# Altium PCB PCB1.PcbDoc (part 1 of 2)
Units mm, origin at the board's own origin, x right, y up, seen from the top; angles counter-clockwise.
Board outline 48 x 73.5 mm, 4 copper layers (Top Copper, Signal Layer 1, Signal Layer 2, Bottom Copper), stack 1.582 mm thick; 72 components, 51 nets, 278 pads, 725 vias.
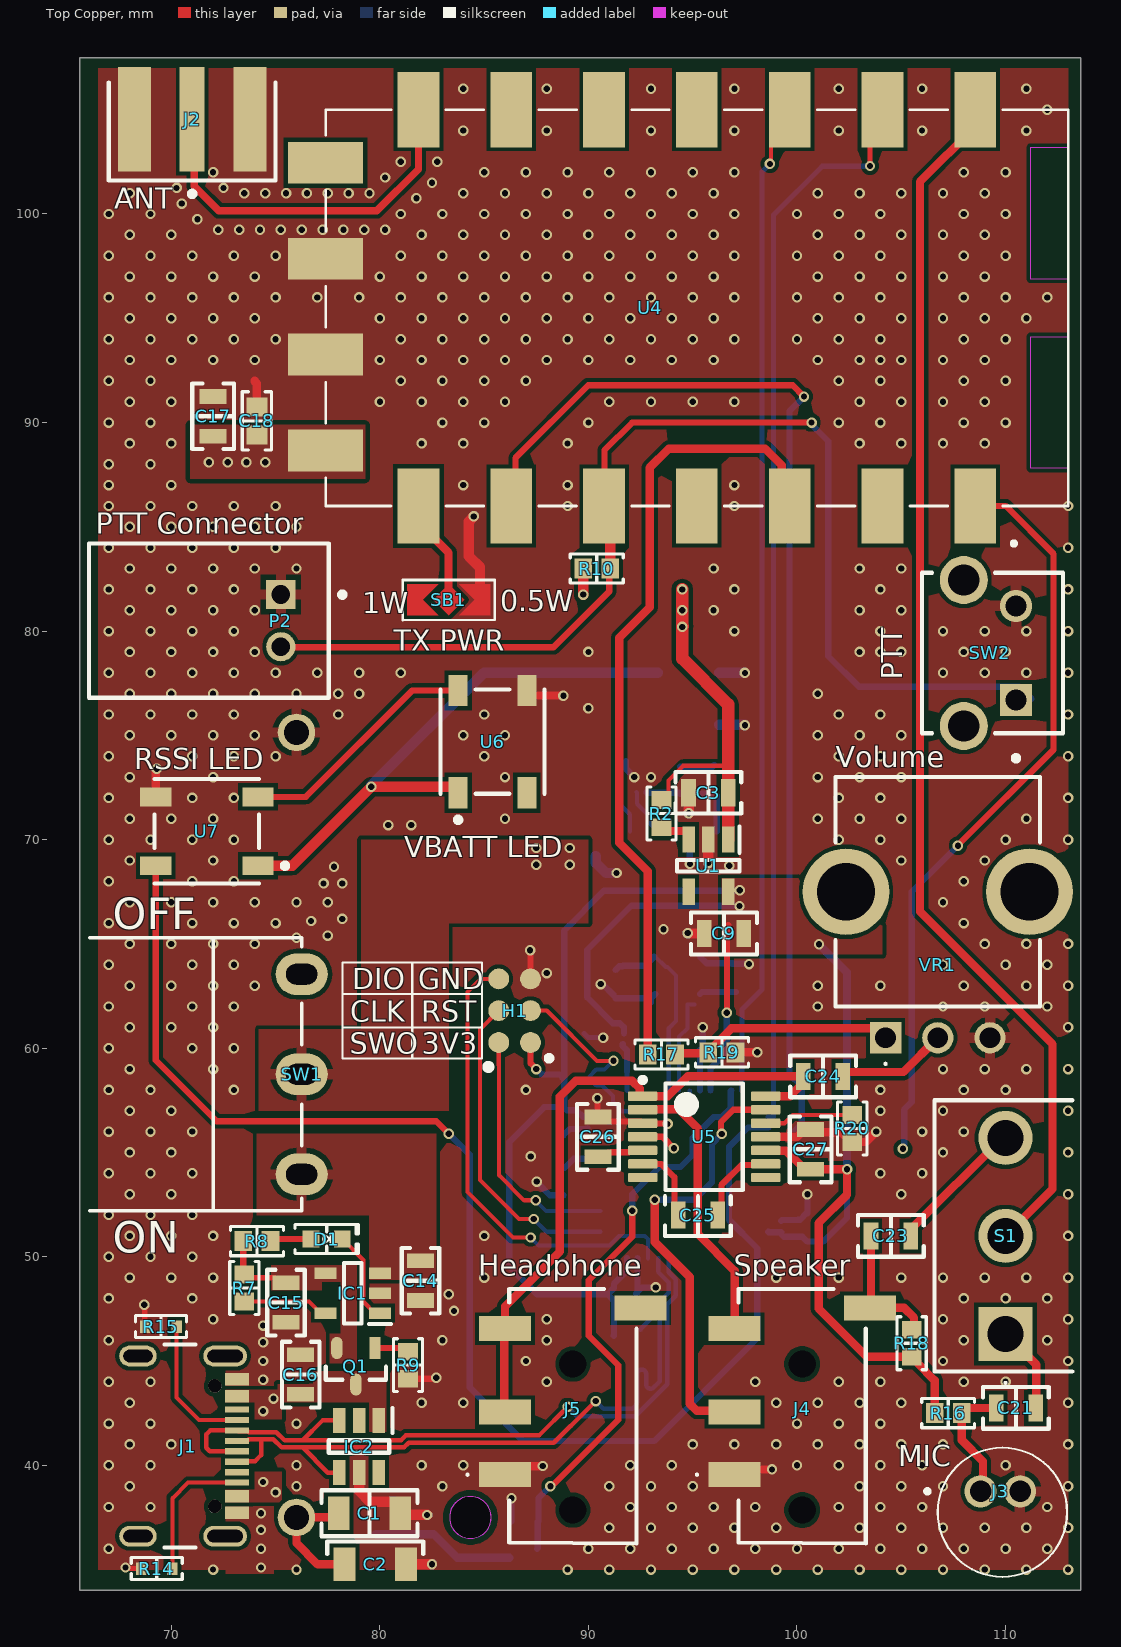
[diagram p0: Top Copper view]
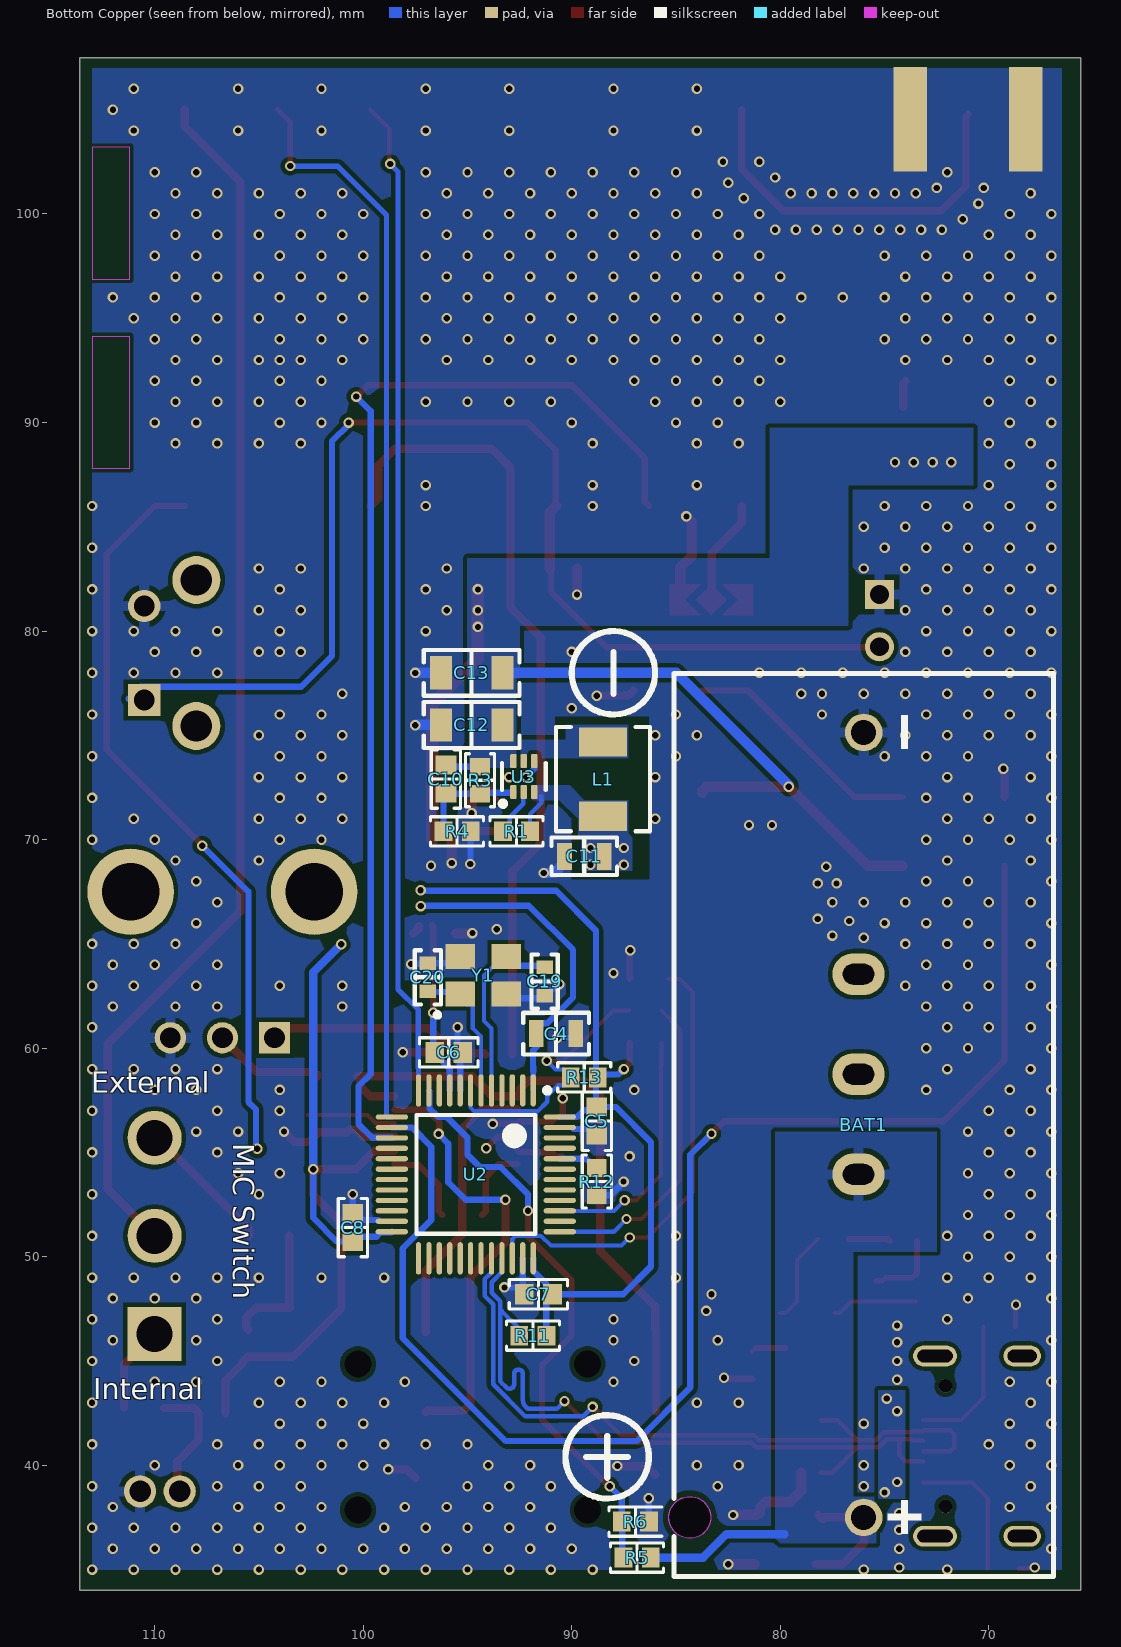
[diagram p1: Bottom Copper view, seen from below]
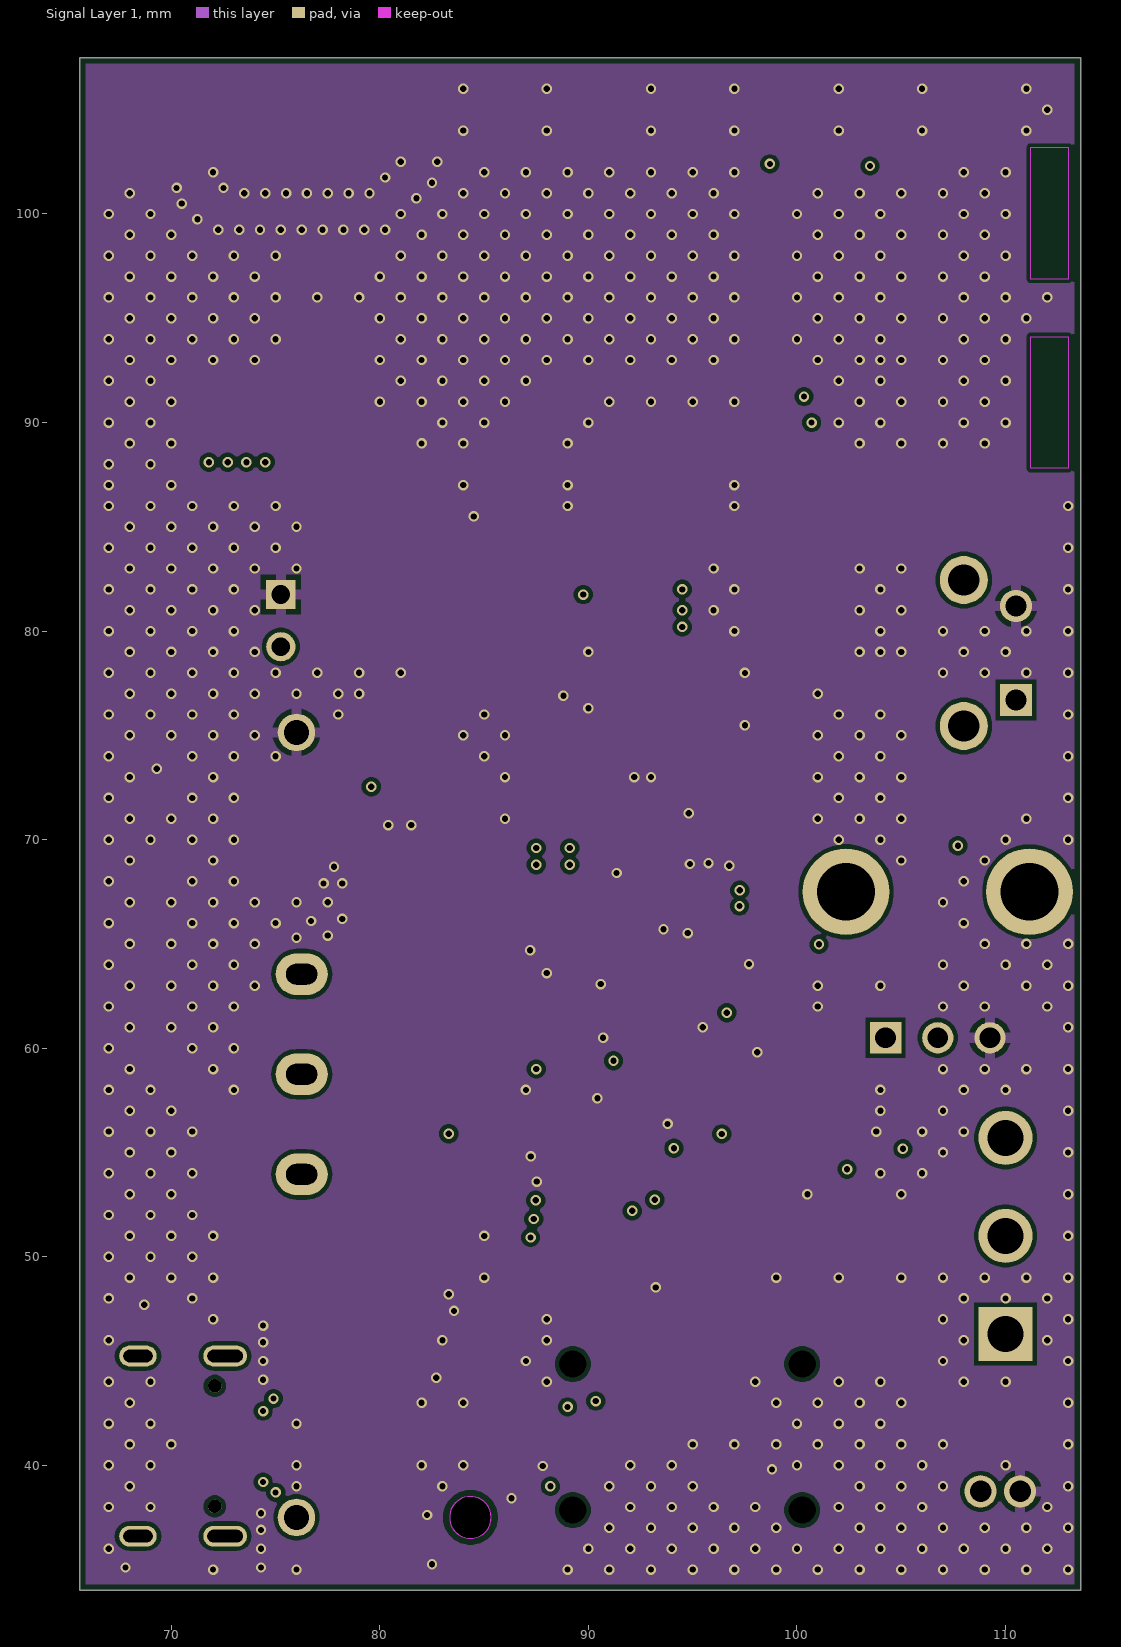
[diagram p2: Signal Layer 1]
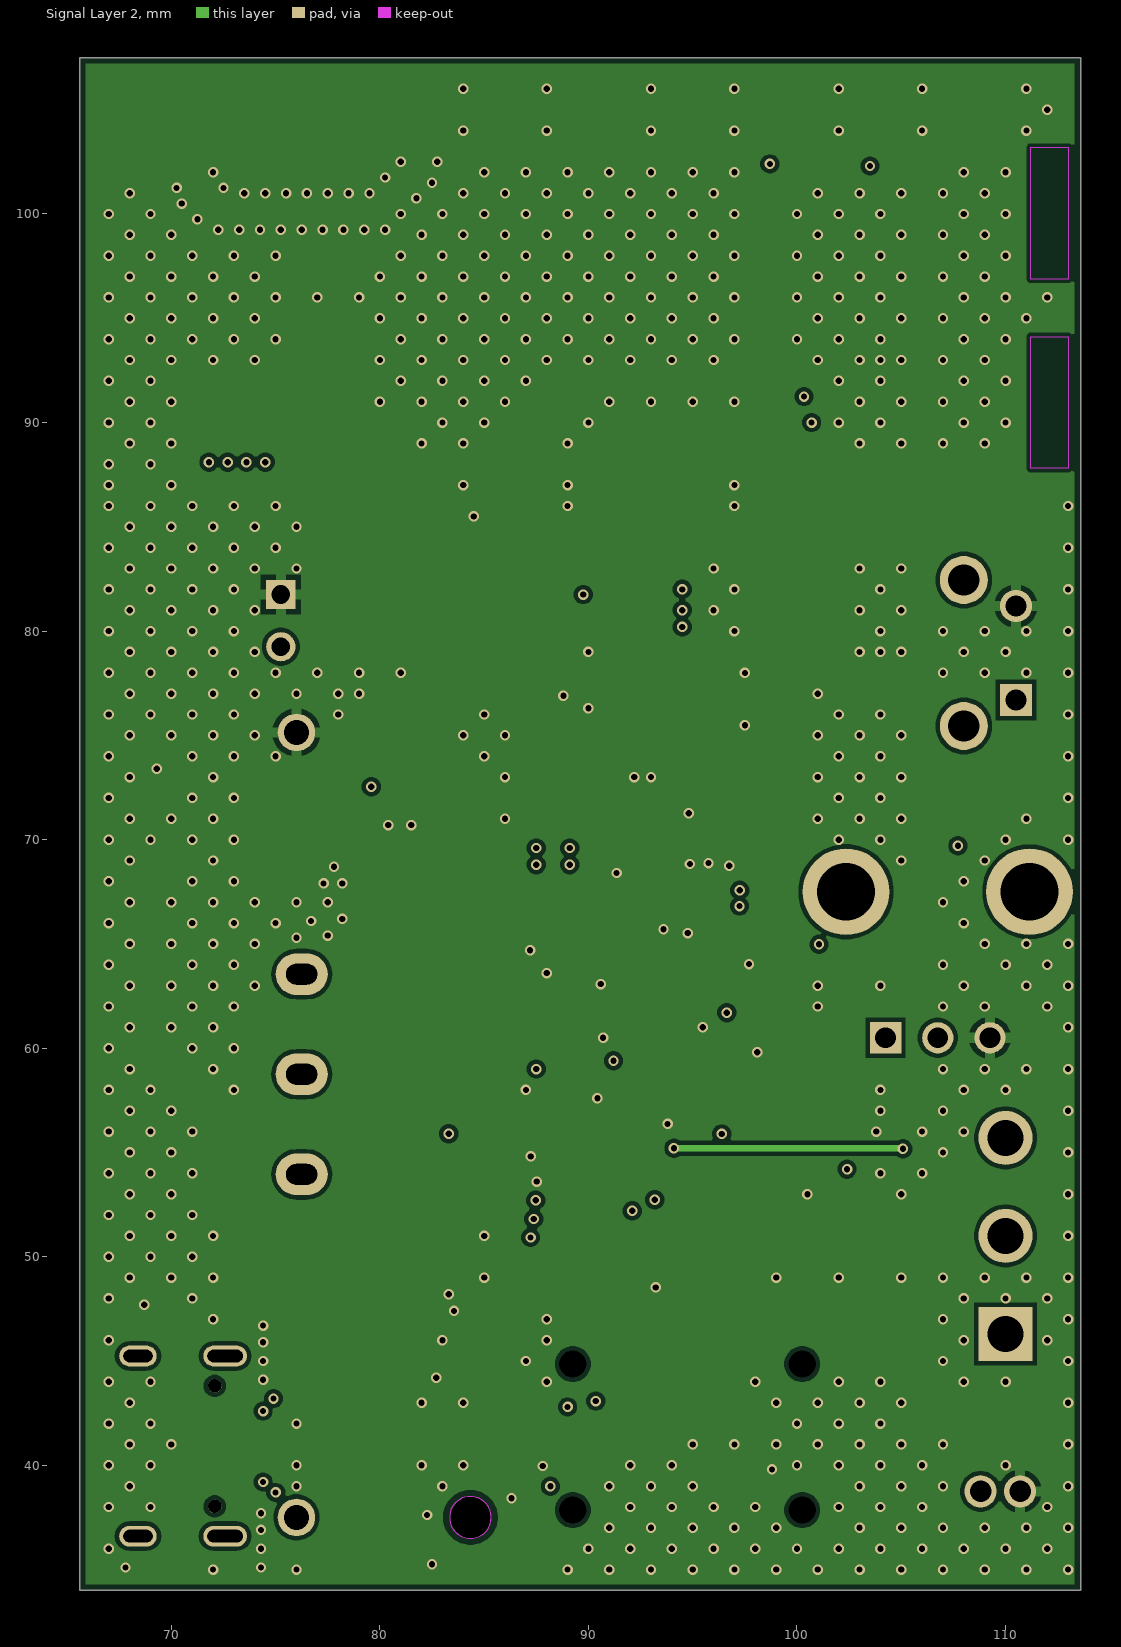
[diagram p3: Signal Layer 2]
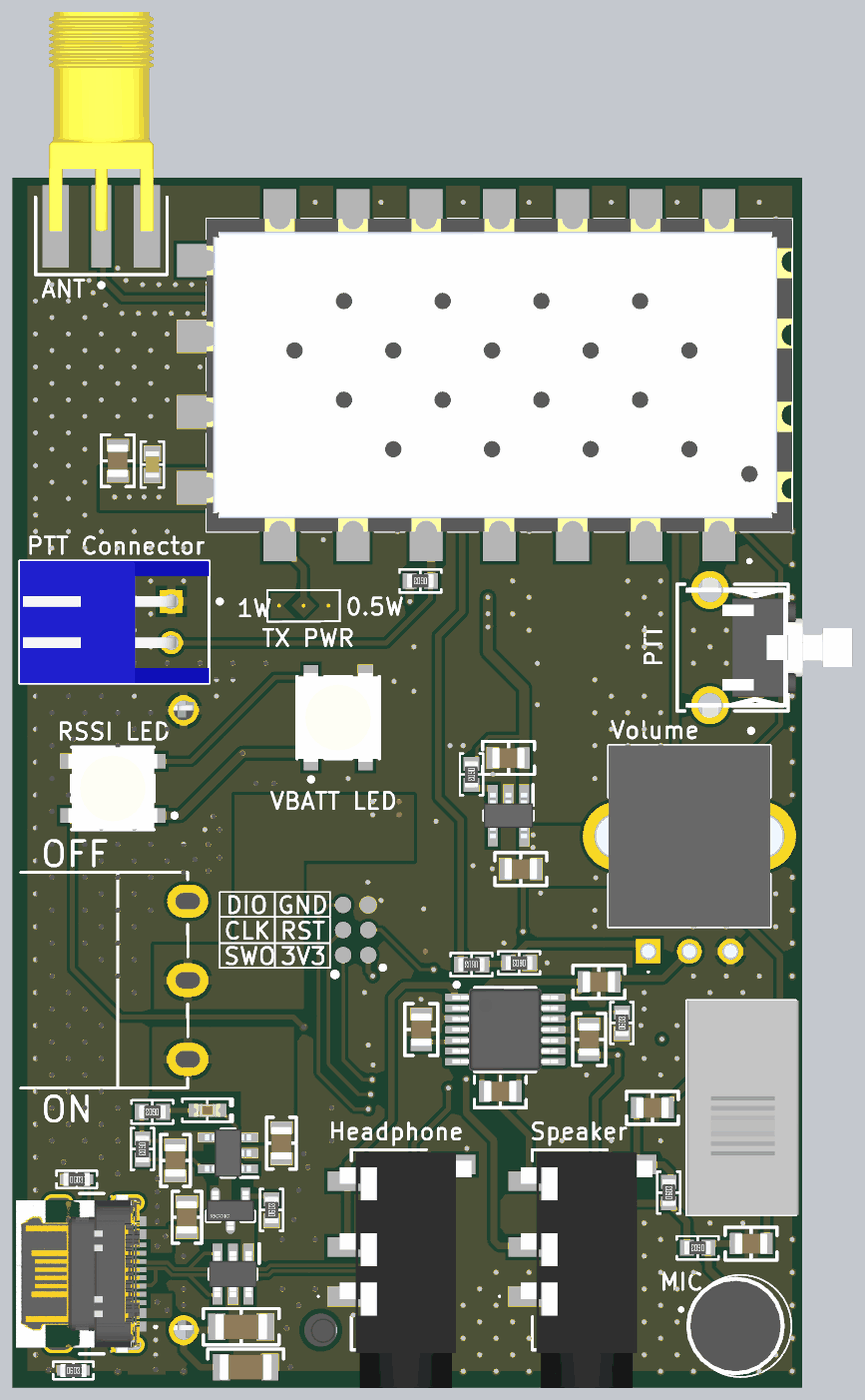
[diagram p5: 3D render of the assembled board from above, using the file's embedded part models]
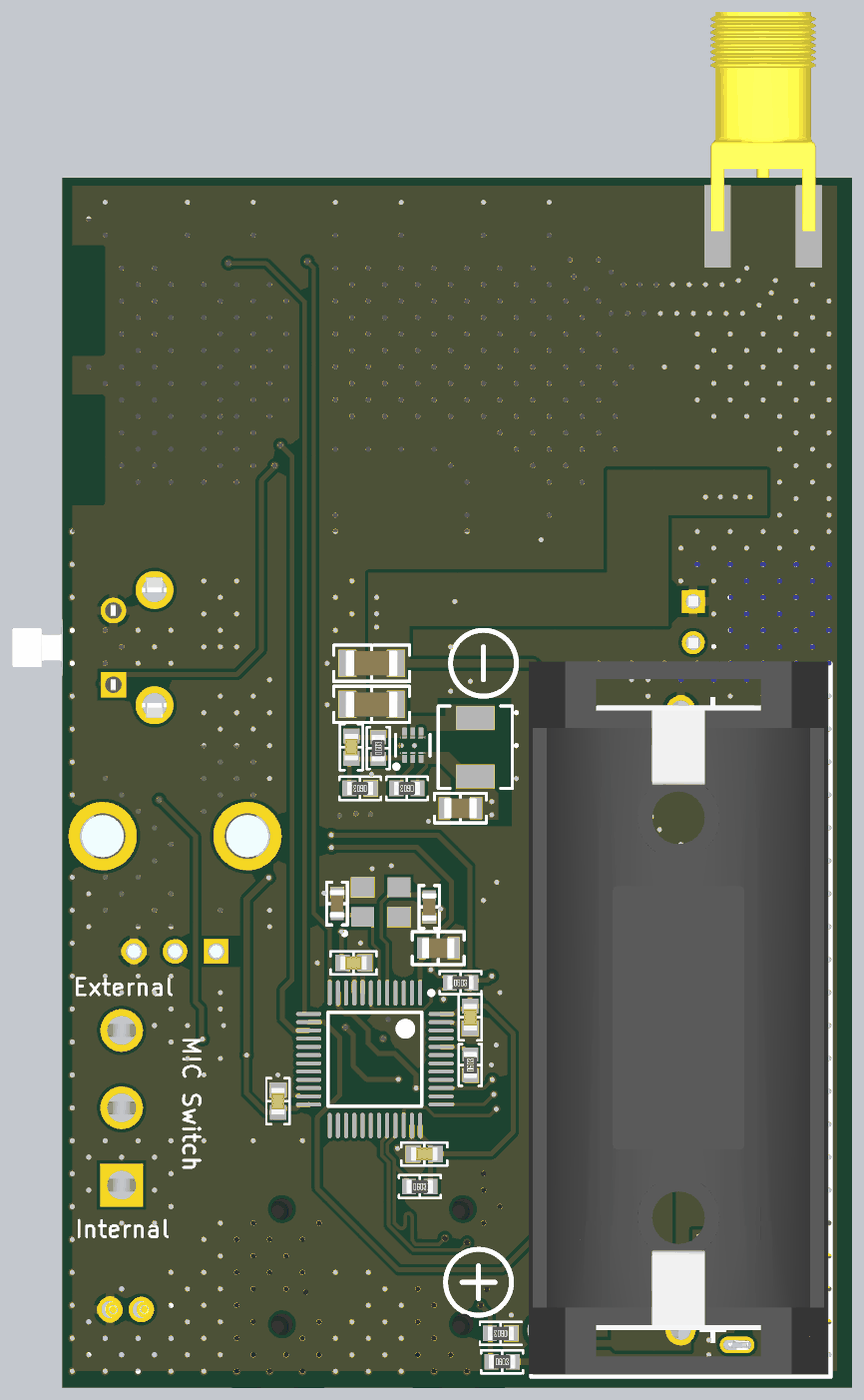
[diagram p6: 3D render of the assembled board from below, using the file's embedded part models]

## Layer stack, top to bottom
Top Mask: solder mask 0.015, Solder Resist, Dk 3.8
Top Copper: signal copper 0.035
Dielectric 1: prepreg 0.2083, PP-022, Dk 4.5
Signal Layer 1: signal copper 0.0152
Core: core 1.065, FR-4, Dk 4.5
Signal Layer 2: signal copper 0.0152
Dielectric 2: prepreg 0.2083, PP-022, Dk 4.5
Bottom Copper: signal copper 0.035
Bottom Mask: solder mask 0.015, Solder Resist, Dk 3.8

## Board outline
65.6,34 65.6,107.5 113.6,107.5 113.6,34

## Design rules (kind name [scope] priority, off if disabled: settings)
BoardOutlineClearance [All] p1: gap=0.3 ignorepadtopadclearanceinfootprint=FALSE except(0.4: Arc-SplitBarrior Arc-SplitContinuation Track-SplitBarrior Track-SplitContinuation SMDPad-SplitBarrior SMDPad-SplitContinuation THPad-SplitBarrior THPad-SplitContinuation Via-SplitBarrior Via-SplitContinuation Fill-SplitBarrior Fill-SplitContinuation Poly-SplitBarrior Poly-SplitContinuation Region-SplitBarrior Region-SplitContinuation Text-SplitBarrior Text-SplitContinuation)
Clearance "Clearance Different Nets" [All] p1: gap=0.2 ignorepadtopadclearanceinfootprint=FALSE except(0.089: Arc-Arc Arc-Track Arc-SMDPad Track-Track Track-SMDPad; 0.127: SMDPad-SMDPad SMDPad-Via THPad-Via Via-Via; 0.254: Arc-Via Arc-Text Track-Via Track-Text SMDPad-Text THPad-Text Via-Text Fill-Text Poly-Text Region-Text Text-Text; 0.5: THPad-THPad Via-Hole)
Clearance "Clearance Same Nets" [All] p2: gap=0.2 ignorepadtopadclearanceinfootprint=TRUE except(0: SMDPad-Via SMDPad-Hole; 0.089: Arc-Arc Arc-Track Arc-SMDPad Track-Track Track-SMDPad SMDPad-SMDPad; 0.127: THPad-Via; 0.254: Arc-Via Arc-Text Track-Via Track-Text SMDPad-Text THPad-Text Via-Via Via-Text Fill-Text Poly-Text Region-Text Text-Text)
Clearance "Clearance Bottom Layer" [OnLayer('Bottom Layer')] p3: gap=0.203 ignorepadtopadclearanceinfootprint=TRUE except(0.254: Arc-Text Track-Text SMDPad-Text THPad-Text Via-Text Fill-Text Poly-Text Region-Text Text-Text)
Clearance "Clearance Top Layer" [OnLayer('Top Layer')] p4: gap=0.203 ignorepadtopadclearanceinfootprint=TRUE except(0.254: Arc-Text Track-Text SMDPad-Text THPad-Text Via-Text Fill-Text Poly-Text Region-Text Text-Text)
DiffPairsRouting [All] p1: maxlimit=0.127 minlimit=0.127 mostfreqgap=0.127 toplayer_minwidth=0.216 toplayer_maxwidth=0.216 toplayer_prefwidth=0.216 midlayer1_minwidth=0.153 midlayer1_maxwidth=0.153 midlayer1_prefwidth=0.153 midlayer2_minwidth=0.153 midlayer2_maxwidth=0.153 midlayer2_prefwidth=0.153 bottomlayer_minwidth=0.216 bottomlayer_maxwidth=0.216 bottomlayer_prefwidth=0.216 impedanceprofiledriven=TRUE impedanceprofileid={143ECB91-8F94-44E2-8FC9-579C614685ED} impedanceprofilevalue=90.000000 maxuncoupledlength=30
Height [All] p1: minheight=0 maxheight=80 prefheight=12.7
HoleSize [All] p1: absolutevalues=TRUE maxlimit=6.3 minlimit=0.2 maxpercent=80.000 minpercent=20.000
MinimumAnnularRing [All] p1: minimumring=0.01
MinimumSolderMaskSliver [All] p1: minsoldermaskwidth=0.1
PolygonConnect PolygonConnect_1 [All] p1: thpad.connectstyle=Relief thpad.reliefconductorwidth=0.508 thpad.reliefentries=4 thpad.polygonreliefangle="90 Angle" thpad.airgapwidth=0.254 smdpad.connectstyle=Direct smdpad.reliefconductorwidth=0.508 smdpad.reliefentries=4 smdpad.polygonreliefangle="90 Angle" smdpad.airgapwidth=0.254 via.connectstyle=Direct via.reliefconductorwidth=0.508 via.reliefentries=4 via.polygonreliefangle="90 Angle" via.airgapwidth=0.254
RoutingCorners [All] p1: cornerstyle=Round minsetback=2.54 maxsetback=2.54
RoutingVias [All] p1: holewidth=0.5 width=1 viastyle="Through Hole" minholewidth=0.2 minwidth=0.35 maxholewidth=1 maxwidth=2
SilkToSilkClearance [All] p1: silktosilkclearance=0.1
SilkToSolderMaskClearance [IsPad] p1: minsilkscreentomaskgap=0.1 clearancetoexposedcopper=TRUE
SolderMaskExpansion [All] p1: expansion=0.03 istentingtop=FALSE
SupplyNets "Schematic Supply Nets_12" [InNet('+VUSB')] p1: voltage=0.000
SupplyNets "Schematic Supply Nets_11" [InNet('+VBATT')] p2: voltage=0.000
SupplyNets "Schematic Supply Nets_10" [InNet('+3V3')] p3: voltage=0.000
SupplyNets "Schematic Supply Nets_9" [InNet('GND')] p4: voltage=0.000
SupplyNets "Schematic Supply Nets" [InNet('+5V')] p5: voltage=0.000
Width [All] p1: maxlimit=5 minlimit=0.1 preferedwidth=0.347 midlayer1_prefwidth=0.266 midlayer2_prefwidth=0.266 minimp=50.000000 maximp=50.000000 favimp=50.000000
23 further rules are at their usual default settings.

## Classes and differential pairs
differential pair D: +D_P -D_N

## Components (designator, comment, footprint, x,y, rotation, side; value= is the part's Value field where it differs from the comment)
BAT1 "BH-123A-A1CJ002" BAT-TH_BH-123A-A5BJ002 76,56.32 r90 bottom
C1 "22 µF" "MURATA CAP GRM31C 1206_3216" 79.5,37.7 r180 top
C2 "22 µF" "MURATA CAP GRM31C 1206_3216" 79.775,35.25 r180 top
C3 "1 µF" "MURATA GRT21 0805_2012" 95.75,72.25 r0 top
C4 "1 µF" "MURATA GRT21 0805_2012" 90.75,60.7 r0 bottom
C5 "0.1 µF" "CAP 0603_1608" 88.8,56.5 r90 bottom
C6 "0.1 µF" "CAP 0603_1608" 95.9,59.8 r0 bottom
C7 "0.1 µF" "CAP 0603_1608" 91.6,48.2 r180 bottom
C8 "0.1 µF" "CAP 0603_1608" 100.5,51.4 r270 bottom
C9 "1 µF" "MURATA GRT21 0805_2012" 96.5,65.5 r0 top
C10 "0.1 µF" "CAP 0603_1608" 96.038,72.905 r90 bottom
C11 "10 µF" "MURATA GRM21B 0805_2012" 89.4,69.2 r180 bottom
C12 "22 µF" "MURATA CAP GRM31C 1206_3216" 94.8,75.5 r180 bottom
C13 "22 µF" "MURATA CAP GRM31C 1206_3216" 94.8,78 r180 bottom
C14 "10 µF" "MURATA GRM21B 0805_2012" 81.95,48.85 r90 top
C15 "10 µF" "MURATA GRM21B 0805_2012" 75.5,47.8 r90 top
C16 "10 µF" "MURATA GRM21B 0805_2012" 76.2,44.35 r270 top
C17 "1 µF" "MURATA GRT21 0805_2012" 72,90.3 r270 top
C18 "0.1 µF" "CAP 0603_1608" 74.1,90.075 r270 top
C19 "10 pF" "MURATA GCM188 0603_1608" 91.3,63.2 r90 bottom
C20 "10 pF" "MURATA GCM188 0603_1608" 96.9,63.4 r270 bottom
C21 "1 µF" "MURATA GRT21 0805_2012" 110.5,42.75 r0 top
C23 "1 µF" "MURATA GRT21 0805_2012" 104.5,51 r0 top
C24 "1 µF" "MURATA GRT21 0805_2012" 101.25,58.65 r0 top
C25 "1 µF" "MURATA GRT21 0805_2012" 95.25,52 r180 top
C26 "1 µF" "MURATA GRT21 0805_2012" 90.45,55.75 r90 top
C27 "1 µF" "MURATA GRT21 0805_2012" 100.65,55.15 r90 top
D1 "RED" "LED 0603_1608 RED" 77.45,50.85 r0 top
H1 "6 pin pad" "6 pin pad-Footprint-1" 87.224,60.276 r180 top
IC1 "TP4054-42-SOT25-R" SOT95P280X100-5N 78.7,48.25 r180 top
IC2 "TPD4E001RDBVR" SOT95P280X145-6N 79,40.9 r270 top
J1 "USB4105-GF-A" FP-USB4105-GF-A-MFG 69.565,40.92 r270 top
J2 "CON-SMA-EDGE-S" FP-CON-SMA-EDGE-S-MFG 71,111.8 r0 top
J3 "CMEJ-0627-42-P" CMEJ062742P 108.75,37.75 r0 top
J4 "PJ-320D" PJ320D 100.25,41.3 r90 top
J5 "PJ-320D" PJ320D 89.25,41.3 r90 top
L1 "1uH" INDM4843X20N 88.5,72.9 r90 bottom
P2 "S2B-XH-A(LF)(SN)" JST-S2B-XH-A(LF)(SN)_V 75.25,80.5 r270 top
Q1 "DMG2305UX-7" FP-SOT23-IPC_C 78.85,44.75 r270 top
R1 "10k" "RES 0603_1608" 92.65,70.4 r0 bottom
R2 "10k" "RES 0603_1608" 93.5,71.25 r270 top
R3 "73k2" "RES 0603_1608" 94.4,72.85 r90 bottom
R4 "10k" "RES 0603_1608" 95.5,70.4 r0 bottom
R5 "10k" "RES 0603_1608" 86.868,35.573 r180 bottom
R6 "24k9" "RES 0603_1608" 86.95,37.3 r0 bottom
R7 "2k2" "RES 0603_1608" 73.5,48.5 r270 top
R8 "1k" "RES 0603_1608" 74.1,50.75 r180 top
R9 "10k" "RES 0603_1608" 81.35,44.8 r90 top
R10 "10 kOhms" "RES 0603_1608" 90.4,83 r180 top
R11 "1k5" "RES 0603_1608" 91.865,46.213 r180 bottom
R12 "10k" "RES 0603_1608" 88.8,53.6 r90 bottom
R13 "10k" "RES 0603_1608" 89.4,58.6 r180 bottom
R14 "5k1" "KOA RES RK73 RN73 0603_1608" 69.3,35.05 r0 top
R15 "5k1" "KOA RES RK73 RN73 0603_1608" 69.5,46.65 r0 top
R16 "2k2" "RES 0603_1608" 107.25,42.5 r180 top
R17 "10k" "RES 0603_1608" 93.5,59.7 r180 top
R18 "2k2" "RES 0603_1608" 105.5,45.85 r90 top
R19 "10k" "RES 0603_1608" 96.4,59.8 r180 top
R20 "27 kOhms" "RES 0603_1608" 102.65,56.15 r90 top
S1 "SS-12D10G4" SS12D10G4 110,46.3 r90 top
SB1 "Solder Bridge 3-way" "Solder Bridge 3-way-Footprint-1" 83.3,81.5 r90 top
SW1 "SS12D10G6-WJ" "SHOU HAN SS12D10G6-WJ-Footprint-1" 76.25,58.75 r270 top
SW2 "Omron B3F-3150" FP-B3F-3150-MFG 111.575,78.95 r90 top
U1 "NCP114ASN330T1G" SOT95P275X110-5N 95.75,68.75 r270 top
U2 "STM32F103C8T6" STM-LQFP48_L 94.6,53.95 r270 bottom
U3 "TPS61023DRLR" FP-DRL0006A-MFG 92.3,73.025 r90 bottom
U4 "SA818S" XCVR_SA818S 95.2,95.5 r180 top
U5 "TPA6139A2PWR" PW0014A_N 95.55,55.75 r0 top
U6 "WS2812B" ADAI-WS2812B_V 85.4,74.7 r90 top
U7 "WS2812B" ADAI-WS2812B_V 71.7,70.4 r180 top
VR1 "RK09K113-LIN10K" RK09K113LIN10K 104.25,60.5 r0 top
Y1 "8MHz" "Yajingxin TX32258M4DBDD2T-Footprint-1" 94.244,63.493 r180 bottom

## Footprints (in the part's own frame and the unit in brackets; to place one, negate y for a bottom-side part, rotate by r counter-clockwise, add the part's x,y. Pads: shape width x height; smd on the part's side, far side on the other; paste and mask are expansions set on the pad)
"6 pin pad-Footprint-1" [mm]
  round 1 smd: 1(0,0) 2(0,-1.524) 3(0,-3.048) 4(1.524,-3.048) 5(1.524,-1.524) 6(1.524,0)
  silkscreen extent -1.02,0.64 -0.76,0.89
ADAI-WS2812B_V [mm] "SMD, 4-Leads, Body 5x5mm, Pitch 3.3mm"
  rect 1.5x0.9 smd: 1(-2.45,1.65) 2(-2.45,-1.65) 3(2.45,-1.65) 4(2.45,1.65)
  silkscreen extent -3.87,-2.5 2.5,2.5, body extent -2.7,-2.5 2.7,2.5, height 1.69
BAT-TH_BH-123A-A5BJ002 [mm]
  round 1.8 hole 1.2: 1(-18.82,0) 2(18.82,0)
  Keep-Out Layer board cut-out: -17.82,8.34 -17.82,8.208 -17.888,7.954 -18.02,7.726 -18.206,7.54 -18.434,7.408 -18.688,7.34 -18.952,7.34 -19.206,7.408 -19.434,7.54 -19.62,7.726 -19.752,7.954 -19.82,8.208 -19.82,8.34 -19.82,8.472 -19.752,8.726 -19.62,8.954 -19.434,9.14 -19.206,9.272 -18.952,9.34 -18.688,9.34 -18.434,9.272 -18.206,9.14 -18.02,8.954 -17.888,8.726 -17.82,8.472 -17.82,8.34 -17.82,8.34
  Keep-Out Layer circle w0.025: c-18.82,8.34 r1
  Keep-Out Layer region: -17.82,8.34 -17.82,8.208 -17.888,7.954 -18.02,7.726 -18.206,7.54 -18.434,7.408 -18.688,7.34 -18.952,7.34 -19.206,7.408 -19.434,7.54 -19.62,7.726 -19.752,7.954 -19.82,8.208 -19.82,8.34 -19.82,8.472 -19.752,8.726 -19.62,8.954 -19.434,9.14 -19.206,9.272 -18.952,9.34 -18.688,9.34 -18.434,9.272 -18.206,9.14 -18.02,8.954 -17.888,8.726 -17.82,8.472 -17.82,8.34 -17.82,8.34
  silkscreen extent -21.65,-9.1 21.65,9.1, body extent -21.5,-8.96 21.79,9.24, height 16
"CAP 0603_1608" [mm] "Chip Capacitor, 2-Leads, Body 1.60x0.80mm, IPC Medium Density"
  rect 0.9x1 smd: 1(-0.675,0) 2(0.675,0)
  silkscreen extent -1.4,-0.7 1.4,0.7, body extent -0.8,-0.41 0.8,0.41, height 0.82
CMEJ062742P [mm]
  round 1.545 hole 1.03: 1(0.05,1) 2(1.95,1)
  silkscreen extent -2.6,-3.1 4.2,3.1, body extent -2.2,-3 3.8,3, height 2.07
FP-B3F-3150-MFG [mm]
  rect 1.55x1.55 hole 1 paste-2539.97 mask+0: 1(-2.25,1.075)
  round 1.55 hole 1 paste-2539.97 mask+0: 2(2.25,1.075)
  round 2.3 hole 1.5 paste-2539.97 mask+0: 3(-3.5,3.575) 4(3.5,3.575)
  silkscreen extent -5.17,-1.17 3.85,5.58, body extent -4.75,-5.68 4.75,5.68, height 0.25
FP-CON-SMA-EDGE-S-MFG [mm]
  rect 1.2x5 smd paste+0 mask+0: 1(0,-7.26)
  rect 1.6x5 smd paste+0 mask+0: 2(-2.77,-7.26) 3(2.77,-7.26)
  rect 1.6x5 smd far side paste+0 mask+0: 4(-2.77,-7.26) 5(2.77,-7.26)
  silkscreen extent -4,-10.96 4,-5.5, body extent -3.67,-9.86 3.67,4.86, height 0.25
FP-DRL0006A-MFG [mm]
  rrect33% 0.67x0.3 smd paste+0 mask+0: 1(-0.74,0.5) 2(-0.74,0) 3(-0.74,-0.5) 4(0.74,-0.5) 5(0.74,0) 6(0.74,0.5)
  silkscreen extent -1.42,-1.05 0.65,1.13, body extent -0.8,-0.8 0.8,0.8, height 0.6
FP-SOT23-IPC_C [mm]
  rect 1.059x0.547 smd paste+0 mask+0: 1(-0.877,0.915)
  rrect100% 1.059x0.547 smd paste+0 mask+0: 2(-0.877,-0.915) 3(0.877,0)
  silkscreen extent 0.03,-1.45 0.65,1.45, body extent -1.2,-1.45 1.2,1.45, height 1.1
FP-USB4105-GF-A-MFG [mm]
  rrect100% 1x2.1 hole 1.7 slot 0.6 at 0 deg paste-2539.97 mask+0: 1(-4.32,3.015) 2(4.32,3.015)
  rrect100% 1x1.8 hole 1.4 slot 0.6 at 0 deg paste-2539.97 mask+0: 3(-4.32,-1.165) 4(4.32,-1.165)
  rect 0.6x1.15 smd paste+0 mask+0: A1-B12(-3.2,3.59) A4-B9(-2.4,3.59) B1-A12(3.2,3.59) B4-A9(2.4,3.59)
  rect 0.3x1.15 smd paste+0 mask+0: A5(-1.25,3.59) A6(-0.25,3.59) A7(0.25,3.59) A8(1.25,3.59) B5(1.75,3.59) B6(0.75,3.59) B7(-0.75,3.59) B8(-1.75,3.59)
  round 0.65 hole 0.65 unplated paste-2539.97 mask+0: ""(-2.89,2.515) ""(2.89,2.515)
  silkscreen extent -4.86,0.11 4.86,1.59, body extent -4.79,-3.77 4.79,3.77, height 3.26
INDM4843X20N [mm] "Molded Inductor, 2-Leads, Body 4.75x4.30mm, IPC Medium Density"
  rect 1.4x2.3 smd: 1(-1.775,0) 2(1.775,0)
  silkscreen extent -2.5,-2.25 2.5,2.25, body extent -2.5,-2.25 2.5,2.25, height 2
JST-S2B-XH-A(LF)(SN)_V [mm] "Header, 2-Leads, Body 7.4x11.5mm, Pitch 2.5mm"
  rect 1.4x1.4 hole 0.9: 1(-1.25,0)
  round 1.4 hole 0.9: 2(1.25,0)
  silkscreen extent -3.7,-9.2 3.7,3.08, body extent -3.7,-9.2 3.7,2.3, height 5.95
"KOA RES RK73 RN73 0603_1608" [mm] "Chip Resistor, 2-Leads, Body 1.60x0.80mm"
  rect 0.5x0.6 smd: 1(-0.75,0) 2(0.75,0)
  silkscreen extent -1.23,-0.53 1.23,0.53, body extent -0.8,-0.4 0.8,0.4, height 0.45
"LED 0603_1608 RED" [mm] "Chip Diode, 2-Leads, Body 1.60x0.80mm, IPC Medium Density"
  rect 0.8x0.8 smd: 1(-0.75,0) 2(0.75,0)
  silkscreen extent -1.52,-0.7 1.52,0.7, body extent -0.8,-0.4 0.8,0.4, height 0.53
"MURATA CAP GRM31C 1206_3216" [mm] "Chip Capacitor, 2-Leads, Body 3.25x1.60mm"
  rect 1.05x1.6 smd: 1(-1.475,0) 2(1.475,0)
  silkscreen extent -2.3,-1.1 2.3,1.1, body extent -1.6,-0.8 1.6,0.8, height 1.6
"MURATA GCM188 0603_1608" [mm] "Chip Capacitor, 2-Leads, Body 1.60x0.80mm"
  rect 0.65x0.8 smd: 1(-0.675,0) 2(0.675,0)
  silkscreen extent -1.3,-0.63 1.3,0.63, body extent -0.85,-0.45 0.85,0.45, height 0.9
"MURATA GRM21B 0805_2012" [mm] "Chip Capacitor, 2-Leads, Body 2.00x1.25mm"
  rect 0.7x1.3 smd: 1(-0.95,0) 2(0.95,0)
  silkscreen extent -1.58,-0.9 1.58,0.9, body extent -1,-0.62 1,0.63, height 1.25
"MURATA GRT21 0805_2012" [mm] "Chip Capacitor, 2-Leads, Body 2.00x1.25mm"
  rect 0.7x1.3 smd: 1(-0.95,0) 2(0.95,0)
  silkscreen extent -1.57,-1 1.58,1, body extent -1,-0.63 1,0.63, height 1.25
PJ320D [mm]
  round 0.65 hole 1.3 unplated: 7(-3.45,0) 8(3.55,0)
  rect 1.2x2.5 smd: R1(1.25,3.25) R2(-1.75,3.25) S(6.25,-3.25) T(5.25,3.25)
  silkscreen extent -5.05,-3.05 7.15,5.1, body extent -7.31,-4.25 6.99,3.75, height 5.36
PW0014A_N [mm] "SOP, 14-Leads, Body 5.1x4.5mm, Pitch 0.65mm, IPC Medium Density"
  rrect22% 1.4x0.45 smd: 1(-2.95,1.95) 2(-2.95,1.3) 3(-2.95,0.65) 4(-2.95,0) 5(-2.95,-0.65) 6(-2.95,-1.3) 7(-2.95,-1.95) 8(2.95,-1.95) 9(2.95,-1.3) 10(2.95,-0.65) 11(2.95,0) 12(2.95,0.65) 13(2.95,1.3) 14(2.95,1.95)
  silkscreen extent -3.07,-2.55 1.85,2.85, body extent -3.21,-2.5 3.21,2.5, height 1
"RES 0603_1608" [mm] "Chip Resistor, 2-Leads, Body 1.60x0.80mm, IPC Medium Density"
  rect 0.85x0.95 smd: 1(-0.65,0) 2(0.65,0)
  silkscreen extent -1.27,-0.7 1.27,0.7, body extent -0.8,-0.4 0.8,0.4, height 0.45
RK09K113LIN10K [mm]
  rect 1.5x1.5 hole 1: 1(0,0)
  round 1.5 hole 1: 2(2.5,0) 3(5,0)
  round 4.155 hole 2.77: MH1(-1.9,7) MH2(6.9,7)
  silkscreen extent -2.4,-1.3 7.4,12.5, body extent -3.18,-0.4 8.18,12.5, height 25.6
"SHOU HAN SS12D10G6-WJ-Footprint-1" [mm]
  oval 2x2.5 hole 1 slot 1.5 at 90 deg: 1(0,0) 2(-4.8,0) 3(4.8,0)
  silkscreen extent -6.55,-10.15 6.55,0.01, body extent -6.35,-16.65 6.35,0, height 6.7
"Solder Bridge 3-way-Footprint-1" [mil]
  round 1 smd mask+3.94: 1(0,59.06) 2(0,0) 3(0,-59.06)
  Top Copper region: 0,-49.21 29.53,-19.69 29.53,-78.74 -29.53,-78.74 -29.53,-19.69
  Top Copper region: 0,-29.53 -29.53,0 0,29.53 29.53,0
  Top Copper region: 0,49.21 -29.53,19.69 -29.53,78.74 29.53,78.74 29.53,19.69
  silkscreen extent -38,-87 37,87
SOT95P275X110-5N [mm]
  rect 1.25x0.6 smd: 1(-1.25,0.95) 2(-1.25,0) 3(-1.25,-0.95) 4(1.25,-0.95) 5(1.25,0.95)
  silkscreen extent -1.87,-1.5 0.28,1.5, body extent -1.38,-1.5 1.38,1.5, height 1.1
SOT95P280X100-5N [mm]
  rect 1.05x0.55 smd: 1(-1.3,0.95) 2(-1.3,0) 3(-1.3,-0.95) 4(1.3,-0.95) 5(1.3,0.95)
  silkscreen extent -1.83,-1.45 0.42,1.48, body extent -1.4,-1.45 1.4,1.45, height 1
SOT95P280X145-6N [mm]
  rect 1.2x0.6 smd: 1(-1.25,0.95) 2(-1.25,0) 3(-1.25,-0.95) 4(1.25,-0.95) 5(1.25,0) 6(1.25,0.95)
  silkscreen extent -1.85,-1.45 0.3,1.6, body extent -1.4,-1.45 1.4,1.45, height 1.2
SS12D10G4 [mm]
  rect 2.595x2.595 hole 1.73: 1(0,0)
  round 2.595 hole 1.73: 2(4.7,0) 3(9.4,0)
  silkscreen extent -2.4,-3.2 11.2,3.4, body extent -1.8,-3.4 11.2,3.4, height 12.45
STM-LQFP48_L [mm] "QFP, 48-Leads, Body 7x7mm, Pitch 0.5mm, IPC High Density"
  oval 1.55x0.25 smd: 1(-4.025,2.75) 2(-4.025,2.25) 3(-4.025,1.75) 4(-4.025,1.25) 5(-4.025,0.75) 6(-4.025,0.25) 7(-4.025,-0.25) 8(-4.025,-0.75) 9(-4.025,-1.25) 10(-4.025,-1.75) 11(-4.025,-2.25) 12(-4.025,-2.75) 25(4.025,-2.75) 26(4.025,-2.25) 27(4.025,-1.75) 28(4.025,-1.25) 29(4.025,-0.75) 30(4.025,-0.25) 31(4.025,0.25) 32(4.025,0.75) 33(4.025,1.25) 34(4.025,1.75) 35(4.025,2.25) 36(4.025,2.75)
  oval 0.25x1.55 smd: 13(-2.75,-4.025) 14(-2.25,-4.025) 15(-1.75,-4.025) 16(-1.25,-4.025) 17(-0.75,-4.025) 18(-0.25,-4.025) 19(0.25,-4.025) 20(0.75,-4.025) 21(1.25,-4.025) 22(1.75,-4.025) 23(2.25,-4.025) 24(2.75,-4.025) 37(2.75,4.025) 38(2.25,4.025) 39(1.75,4.025) 40(1.25,4.025) 41(0.75,4.025) 42(0.25,4.025) 43(-0.25,4.025) 44(-0.75,4.025) 45(-1.25,4.025) 46(-1.75,4.025) 47(-2.25,4.025) 48(-2.75,4.025)
  silkscreen extent -4.15,-2.85 2.85,3.55, body extent -3.5,-3.5 3.5,3.5, height 1.6
XCVR_SA818S [mm]
  rect 2x3.6 smd: 1(-13.35,9.5) 2(-8.9,9.5) 3(-4.45,9.5) 4(0,9.5) 5(4.45,9.5) 6(8.9,9.5) 7(13.35,9.5) 12(13.35,-9.5) 13(8.9,-9.5) 14(4.45,-9.5) 15(0,-9.5) 16(-4.45,-9.5) 17(-8.9,-9.5) 18(-13.35,-9.5)
  rect 3.6x2 smd: 8(17.8,6.84) 9(17.8,2.24) 10(17.8,-2.36) 11(17.8,-6.96)
  Keep-Out Layer region: -16,-7.7 -17.8,-7.7 -17.8,-1.38 -16,-1.38
  Keep-Out Layer region: -16,1.38 -17.8,1.38 -17.8,7.7 -16,7.7
  silkscreen extent -17.8,-9.5 17.8,11.4, body extent -17.8,-9.5 17.8,9.5, height 3.2
"Yajingxin TX32258M4DBDD2T-Footprint-1" [mm]
  rect 1.4x1.2 smd: 1(-1.1,-0.9) 2(1.1,-0.9) 3(1.1,0.9) 4(-1.1,0.9)
  silkscreen extent -2.3,-2 -2.1,-1.8, body extent -1.9,-1.6 1.9,1.6, height 0.3

## Part data
BAT1: library part CMP-00029-00002-4, JLCPCB Part Class="Extended Part", LCSC Part Name="电池盒 适用电池:CR123A", manufacturer=MYOUNG(美阳), Operating Temperature=-25℃~+85℃, Add into BOM=yes, Battery Type=CR123A, Connector Type="Battery Holder", Contact Material="Stainless Steel", Contact Plating=Nickel, Convert to PCB=yes, Datasheet=https://item.szlcsc.com/datasheet/BH-123A-A1CJ002/6030883.html, Design Item ID=BH-123A-A1CJ002, Device=BH-123A-A1CJ002, Manufacturer Part=BH-123A-A1CJ002, Source=BH-123A-A5BJ0021_BH-123A-A5BJ002.SCHLIB, Supplier Footprint=-, Supplier Part=C5290177, Symbol=BH-123A-A5BJ002
C1 C2 C12 C13: library part GRM31CC81E226KE11L, "CAP CER 22UF 25V X6S 1206", Device Package="1206 (3216 Metric)", manufacturer="Murata Electronics", Operating Temperature="-55°C ~ 105°C", Supplier Part Number 1=490-14468-1-ND, Temperature Coefficient=X6S, Tolerance=±10%, Voltage - Rated=25V, Applications="General Purpose", Capacitance="22 µF", componentlink1description=Datasheet, componentlink1url=https://search.murata.co.jp/Ceramy/image/img/A01X/G101/ENG/GRM31CC81E226KE11-01.pdf, componentlink2description="DigiKey Link", componentlink2url=https://www.digikey.com/en/products/detail/murata-electronics/GRM31CC81E226KE11L/6606097, lastupdated="7/27/2025 6:13:51 AM", Lifecycle Status=Active, Minimum Order=1, Mounting Type="Surface Mount, MLCC", Package / Case="1206 (3216 Metric)", packaging=TapeAndReel, Part Number=GRM31CC81E226KE11L, Part Status=Active, partid=31407, price=0.31, series=GRM, Size / Dimension="0.126\" L x 0.063\" W (3.20mm x 1.60mm)", Supplier 1=DigiKey, Thickness (Max)="0.075\" (1.90mm)"
C3 C4 C9 C17 C21 C23 C24 C25 C26 C27: library part GRT21BR71H105KE01L, "CAP CER 1UF 50V X7R 0805", Device Package="0805 (2012 Metric)", manufacturer="Murata Electronics", Operating Temperature="-55°C ~ 125°C", Ratings=AEC-Q200, Supplier Part Number 1=490-GRT21BR71H105KE01LCT-ND, Temperature Coefficient=X7R, Tolerance=±10%, Voltage - Rated=50V, Applications=Automotive, Capacitance="1 µF", componentlink1description=Datasheet, componentlink1url=https://search.murata.co.jp/Ceramy/image/img/A01X/G101/ENG/GRT21BR71H105KE01-01.pdf, componentlink2description="DigiKey Link", componentlink2url=https://www.digikey.com/en/products/detail/murata-electronics/GRT21BR71H105KE01L/10702345, lastupdated="7/27/2025 6:11:26 AM", Lifecycle Status=Active, Minimum Order=1, Mounting Type="Surface Mount, MLCC", Package / Case="0805 (2012 Metric)", packaging=TapeAndReel, Part Number=GRT21BR71H105KE01L, Part Status=Active, partid=48766, price=0.03, series=GRT, Size / Dimension="0.079\" L x 0.049\" W (2.00mm x 1.25mm)", Supplier 1=DigiKey, Thickness (Max)="0.053\" (1.35mm)"
C5 C6 C7 C8 C10 C18: library part GCJ188R71H104KA12D, "CAP CER 0.1UF 50V X7R 0603", Device Package="0603 (1608 Metric)", manufacturer="Murata Electronics", Operating Temperature="-55°C ~ 125°C", Ratings=AEC-Q200, Supplier Part Number 1=490-5798-1-ND, Temperature Coefficient=X7R, Tolerance=±10%, Voltage - Rated=50V, Applications="Automotive, Boardflex Sensitive", Capacitance="0.1 µF", componentlink1description=Datasheet, componentlink1url=https://www.murata.com/~/media/webrenewal/support/library/catalog/products/capacitor/mlcc/c03e.ashx?la=en-us, componentlink2description="DigiKey Link", componentlink2url=https://www.digikey.com/en/products/detail/murata-electronics/GCJ188R71H104KA12D/2783803, Features="Soft Termination", lastupdated="2/9/2024 8:10:08 PM", Lifecycle Status=Active, Minimum Order=1, Mounting Type="Surface Mount, MLCC", Package / Case="0603 (1608 Metric)", packaging=TapeAndReel, Part Number=GCJ188R71H104KA12D, Part Status=Active, partid=16867, price=0.01, series=GCJ, Size / Dimension="0.063\" L x 0.031\" W (1.60mm x 0.80mm)", Supplier 1=DigiKey, Thickness (Max)="0.035\" (0.90mm)"
C11 C14 C15 C16: library part GRM21BR61H106ME43L, "CAP CER 10UF 50V X5R 0805", Device Package="0805 (2012 Metric)", manufacturer="Murata Electronics", Operating Temperature="-55°C ~ 85°C", Supplier Part Number 1=490-18664-1-ND, Temperature Coefficient=X5R, Tolerance=±20%, Voltage - Rated=50V, Applications="General Purpose", Capacitance="10 µF", componentlink1description=Datasheet, componentlink1url=https://search.murata.co.jp/Ceramy/image/img/A01X/G101/ENG/GRM21BR61H106ME43-01A.pdf, componentlink2description="DigiKey Link", componentlink2url=https://www.digikey.com/en/products/detail/murata-electronics/GRM21BR61H106ME43L/10326317, lastupdated="8/27/2024 9:29:56 AM", Lifecycle Status=Active, Minimum Order=1, Mounting Type="Surface Mount, MLCC", Package / Case="0805 (2012 Metric)", packaging=TapeAndReel, Part Number=GRM21BR61H106ME43L, Part Status=Active, partid=41295, price=0.05, series=GRM, Size / Dimension="0.079\" L x 0.049\" W (2.00mm x 1.25mm)", Supplier 1=DigiKey, Thickness (Max)="0.057\" (1.45mm)"
C19 C20: library part GCM1885C2A100FA16D, "CAP CER 10PF 100V C0G/NP0 0603", Device Package="0603 (1608 Metric)", manufacturer="Murata Electronics", Operating Temperature="-55°C ~ 125°C", Ratings=AEC-Q200, Supplier Part Number 1=490-GCM1885C2A100FA16DCT-ND, Temperature Coefficient="C0G, NP0", Tolerance=±1%, Voltage - Rated=100V, Applications=Automotive, Capacitance="10 pF", componentlink1description=Datasheet, componentlink1url=https://search.murata.co.jp/Ceramy/image/img/A01X/G101/ENG/GCM1885C2A100FA16-01.pdf, componentlink2description="DigiKey Link", componentlink2url=https://www.digikey.com/en/products/detail/murata-electronics/GCM1885C2A100FA16D/11618736, lastupdated="7/20/2024 12:24:59 AM", Lifecycle Status=Active, Minimum Order=1, Mounting Type="Surface Mount, MLCC", Package / Case="0603 (1608 Metric)", packaging=TapeAndReel, Part Number=GCM1885C2A100FA16D, Part Status=Active, partid=36047, price=0.02, series=GCM, Size / Dimension="0.063\" L x 0.031\" W (1.60mm x 0.80mm)", Supplier 1=DigiKey, Thickness (Max)="0.035\" (0.90mm)"
D1: library part B1931URO-20D000114U1930, "LED RED DIFFUSED 0603 SMD", Color=Red, Current - Test=20mA, Device Package="0603 (1608 Metric)", manufacturer="Harvatek Corporation", Millicandela Rating=45mcd, Supplier Device Package=0603, Supplier Part Number 1=3147-B1931URO-20D000114U1930CT-ND, Voltage - Forward (Vf) (Typ)=2V, componentlink2description="DigiKey Link", componentlink2url=https://www.digikey.com/en/products/detail/harvatek-corporation/B1931URO-20D000114U1930/15910603, lastupdated="6/3/2024 7:59:45 PM", Lens Size="1.00mm x 0.80mm", Lens Style="Rectangle with Flat Top", Lens Transparency=Diffused, Lifecycle Status=Active, Minimum Order=1, Mounting Type="Surface Mount", Package / Case="0603 (1608 Metric)", packaging=TapeAndReel, Part Number=B1931URO-20D000114U1930, Part Status=Active, partid=1009, price=0.04, series=-, Size / Dimension="1.60mm L x 0.80mm W", Supplier 1=DigiKey, Viewing Angle="125°, 135°", Wavelength - Peak=639nm
H1: library part CMP-002-00084-1
IC1: "Integrated Circuit", Manufacturer_Name="TOP POWER", Datasheet Link=http://images.100y.com.tw/pdf_file/38-TP-TP4054x.pdf, Height=1mm, Manufacturer_Part_Number=TP4054-42-SOT25-R
IC2: "Integrated Circuit", Manufacturer_Name="Texas Instruments", Mouser Part Number=595-TPD4E001RDBVR, Arrow Part Number=TPD4E001RDBVR, Arrow Price/Stock=https://www.arrow.com/en/products/tpd4e001rdbvr/texas-instruments?utm_currency=USD&region=nac, Datasheet Link=http://www.ti.com/lit/gpn/TPD4E001, Height=1.45mm, Manufacturer_Part_Number=TPD4E001RDBVR, Mouser Price/Stock=https://www.mouser.co.uk/ProductDetail/Texas-Instruments/TPD4E001RDBVR?qs=P1JMDcb91o7xMbcYcXI1uw%3D%3D
J1: library part CMP-002-00071-2, "Conn USB 2.0 Type C RCP 24 POS 0.3mm/0.5mm Solder RA SMD 24 Terminal 1 Port T/R"
J2: library part CMP-002-00085-1, "Sma Female Connector, Pcb Edge Mount Rohs Compliant: Yes", Case/Package=SMA, Pins=1
J3: "Connector", Manufacturer_Name="Same Sky", Mouser Part Number=490-CMEJ-0627-42-P, Arrow Part Number=CMEJ-0627-42-P, Arrow Price/Stock=https://www.arrow.com/en/products/cmej-0627-42-p/cui-devices, Datasheet Link=https://www.sameskydevices.com/product/resource/cmej-0627-42-p.pdf, Height=3.18mm, Manufacturer_Part_Number=CMEJ-0627-42-P, Mouser Price/Stock=https://www.mouser.co.uk/ProductDetail/CUI-Devices/CMEJ-0627-42-P?qs=PzGy0jfpSMsjZjkg1iQyPQ%3D%3D
J4 J5: "Connector", Manufacturer_Name=Audio-Technica, Datasheet Link=https://p.globalsources.com/IMAGES/PDT/SPEC/432/K1007154432.pdf, Height=5.75mm, Manufacturer_Part_Number=PJ-320D
L1: library part CMP-006-00027-1, "1uH, 6A, 27mR, SMD 4.5x4.1mm"
P2: library part CMP-002-00032-2, "Male Header, Pitch 2.5 mm, 1 x 2 Position, Height 6.1 mm, Tail Length 3.4 mm, -25 to 85 degC, RoHS, Bulk", manufacturer=JST, Max Operating Temperature=85°C, Min Operating Temperature=-25°C, Package Description="XH Series Disconnectable Crimp Style Connector, Pitch 2.5 mm, 1 x 2 Position, Height 6.1 mm, Tail Length 3.4 mm", Case/Package=S2B-XH-A(LF)(SN), Connector Type=Header, Datasheet URL=http://www.jst-mfg.com/product/pdf/eng/eXH.pdf, Datasheet Version=May-16, Gender=Male, Manufacturer URL=http://www.jst.com/home2.html, Mounting Technology=TH, Package Reference=S2B-XH-A(LF)(SN), RoHS Compliant=Unknown
Q1: library part CMP-019-00063-1, "P-Channel 20 V 52 mOhm Surface Mount Enhancement Mode Mosfet - SOT-23-3", Case/Package=SOT-23, Max Operating Temperature=150°C, Max Power Dissipation=1.4W, Min Operating Temperature=-55°C, Mounting Technology="Surface Mount", Pins=3
R1 R2: library part RCS060310K0JNEA, "RES SMD 10K OHM 5% 1/4W 0603", Device Package="0603 (1608 Metric)", manufacturer="Vishay Dale", Operating Temperature="-55°C ~ 155°C", Power (Watts)="0.25W, 1/4W", Ratings=AEC-Q200, Resistance="10 kOhms", Supplier Device Package=0603, Supplier Part Number 1=541-2817-1-ND, Temperature Coefficient=±200ppm/°C, Tolerance=±5%, componentlink1description=Datasheet, componentlink1url=http://www.vishay.com/docs/20065/rcse3.pdf, componentlink2description="DigiKey Link", componentlink2url=https://www.digikey.com/en/products/detail/vishay-dale/RCS060310K0JNEA/5866963, Composition="Thick Film", Features="Automotive AEC-Q200, Pulse Withstanding", Height - Seated (Max)="0.020\" (0.50mm)", lastupdated="2/9/2024 8:43:35 PM", Lifecycle Status=Active, Minimum Order=1, Number of Terminations=2, Package / Case="0603 (1608 Metric)", packaging=TapeAndReel, Part Number=RCS060310K0JNEA, Part Status=Active, partid=5383, price=0.01, series="RCS e3", Size / Dimension="0.061\" L x 0.033\" W (1.55mm x 0.85mm)", Supplier 1=DigiKey
R3: library part ESR03EZPF7322, "ANTI-SURGE CHIP RESISTORS", Device Package="0603 (1608 Metric)", manufacturer="Rohm Semiconductor", Operating Temperature="-55°C ~ 155°C", Power (Watts)="0.25W, 1/4W", Ratings=AEC-Q200, Resistance="73.2 kOhms", Supplier Device Package=0603, Supplier Part Number 1=511-ESR03EZPF7322CT-ND, Temperature Coefficient=±100ppm/°C, Tolerance=±1%, componentlink1description=Datasheet, componentlink1url=https://www.rohm.com/datasheet?p=ESR01MZPF&dist=Digi-key&media=referral&source=digi-key.com&campaign=Digi-key, componentlink2description="DigiKey Link", componentlink2url=https://www.digikey.com/en/products/detail/rohm-semiconductor/ESR03EZPF7322/20486496, Composition="Thick Film", Features="Automotive AEC-Q200, Pulse Withstanding", Height - Seated (Max)="0.022\" (0.55mm)", lastupdated="2/9/2024 8:40:36 PM", Lifecycle Status=Active, Minimum Order=1, Number of Terminations=2, Package / Case="0603 (1608 Metric)", packaging=TapeAndReel, Part Number=ESR03EZPF7322, partid=80019, price=0.02, series=ESR, Size / Dimension="0.063\" L x 0.031\" W (1.60mm x 0.80mm)", Supplier 1=DigiKey
R4 R5 R8 R9 R17: library part TNPW060310K0BETA, "RES 10K OHM 0.1% 1/10W 0603", Device Package="0603 (1608 Metric)", manufacturer="Vishay Dale", Operating Temperature="-55°C ~ 125°C", Power (Watts)="0.1W, 1/10W", Resistance="10 kOhms", Supplier Device Package=0603, Supplier Part Number 1=541-3574-1-ND, Temperature Coefficient=±25ppm/°C, Tolerance=±0.1%, componentlink1description=Datasheet, componentlink1url=http://www.vishay.com/docs/31006/tnpw.pdf, componentlink2description="DigiKey Link", componentlink2url=https://www.digikey.com/en/products/detail/vishay-dale/TNPW060310K0BETA/1613679, Composition="Thin Film", Features=Military, Height - Seated (Max)="0.022\" (0.55mm)", lastupdated="2/9/2024 8:42:58 PM", Lifecycle Status=Active, Minimum Order=1, Number of Terminations=2, Package / Case="0603 (1608 Metric)", packaging=TapeAndReel, Part Number=TNPW060310K0BETA, Part Status=Active, partid=14670, price=0.27, series=TNPW, Size / Dimension="0.063\" L x 0.033\" W (1.60mm x 0.85mm)", Supplier 1=DigiKey
R6: library part RQ73C1J24K9BTDF, "RQ 0603 24K9 0.1% 10PPM 1K RL", Device Package="0603 (1608 Metric)", manufacturer="TE Connectivity Passive Product", Operating Temperature="-55°C ~ 155°C", Power (Watts)=0.15W, Ratings=AEC-Q200, Resistance="24.9 kOhms", Supplier Device Package=0603, Supplier Part Number 1=1712-RQ73C1J24K9BTDFCT-ND, Temperature Coefficient=±10ppm/°C, Tolerance=±0.1%, componentlink1description=Datasheet, componentlink1url=https://www.te.com/commerce/DocumentDelivery/DDEController?Action=srchrtrv&DocNm=1773270-2&DocType=DS&DocLang=English, componentlink2description="DigiKey Link", componentlink2url=https://www.digikey.com/en/products/detail/te-connectivity-passive-product/RQ73C1J24K9BTDF/13941756, Composition="Thin Film", Features="Anti-Sulfur, Automotive AEC-Q200, Moisture Resistant", Height - Seated (Max)="0.022\" (0.55mm)", lastupdated="2/9/2024 8:41:25 PM", Lifecycle Status=Active, Minimum Order=1, Number of Terminations=2, Package / Case="0603 (1608 Metric)", packaging=TapeAndReel, Part Number=RQ73C1J24K9BTDF, Part Status=Active, partid=62758, price=0.38, series=RQ73, Size / Dimension="0.061\" L x 0.031\" W (1.55mm x 0.80mm)", Supplier 1=DigiKey
R7 R16 R18 R19: library part CMP0603QFX-2201ELF, "RES CHIP 0603 2K2 1% 1/4W TC100", Device Package="0603 (1608 Metric)", manufacturer="Bourns Inc.", Operating Temperature="-55°C ~ 155°C", Power (Watts)="0.25W, 1/4W", Ratings=AEC-Q200, Resistance="2.2 kOhms", Supplier Device Package=0603, Supplier Part Number 1=118-CMP0603QFX-2201ELFCT-ND, Temperature Coefficient=±100ppm/°C, Tolerance=±1%, componentlink1description=Datasheet, componentlink1url=https://www.bourns.com/docs/Product-Datasheets/CMP-Q.pdf, componentlink2description="DigiKey Link", componentlink2url=https://www.digikey.com/en/products/detail/bourns-inc/CMP0603QFX-2201ELF/17737299, Composition="Thick Film", Features="Automotive AEC-Q200, Pulse Withstanding", Height - Seated (Max)="0.022\" (0.55mm)", lastupdated="2/9/2024 8:41:02 PM", Lifecycle Status=Active, Minimum Order=1, Number of Terminations=2, Package / Case="0603 (1608 Metric)", packaging=TapeAndReel, Part Number=CMP0603QFX-2201ELF, Part Status=Active, partid=78343, price=0.02, series=CMP-Q, Size / Dimension="0.063\" L x 0.031\" W (1.60mm x 0.80mm)", Supplier 1=DigiKey
R10: library part RCS060310K0JNEA, "RES SMD 10K OHM 5% 1/4W 0603", Device Package="0603 (1608 Metric)", manufacturer="Vishay Dale", Operating Temperature="-55°C ~ 155°C", Power (Watts)="0.25W, 1/4W", Ratings=AEC-Q200, Supplier Device Package=0603, Supplier Part Number 1=541-2817-1-ND, Temperature Coefficient=±200ppm/°C, Tolerance=±5%, componentlink1description=Datasheet, componentlink1url=http://www.vishay.com/docs/20065/rcse3.pdf, componentlink2description="DigiKey Link", componentlink2url=https://www.digikey.com/en/products/detail/vishay-dale/RCS060310K0JNEA/5866963, Composition="Thick Film", Features="Automotive AEC-Q200, Pulse Withstanding", Height - Seated (Max)="0.020\" (0.50mm)", lastupdated="2/9/2024 8:43:35 PM", Lifecycle Status=Active, Minimum Order=1, Number of Terminations=2, Package / Case="0603 (1608 Metric)", packaging=TapeAndReel, Part Number=RCS060310K0JNEA, Part Status=Active, partid=5383, price=0.01, Resistance="10 kOhms", series="RCS e3", Size / Dimension="0.061\" L x 0.033\" W (1.55mm x 0.85mm)", Supplier 1=DigiKey
R11: library part RNCP0603FTD1K50, "RES 1.5K OHM 1% 1/8W 0603", Device Package="0603 (1608 Metric)", manufacturer="Stackpole Electronics Inc", Operating Temperature="-55°C ~ 155°C", Power (Watts)="0.125W, 1/8W", Resistance="1.5 kOhms", Supplier Device Package=0603, Supplier Part Number 1=RNCP0603FTD1K50CT-ND, Temperature Coefficient=±100ppm/°C, Tolerance=±1%, componentlink1description=Datasheet, componentlink1url=https://www.seielect.com/catalog/sei-rncp.pdf, componentlink2description="DigiKey Link", componentlink2url=https://www.digikey.com/en/products/detail/stackpole-electronics-inc/RNCP0603FTD1K50/2240110, Composition="Thin Film", Features=Anti-Sulfur, Height - Seated (Max)="0.022\" (0.55mm)", lastupdated="2/9/2024 8:43:33 PM", Lifecycle Status=Active, Minimum Order=1, Number of Terminations=2, Package / Case="0603 (1608 Metric)", packaging=TapeAndReel, Part Number=RNCP0603FTD1K50, Part Status=Active, partid=5700, price=0.01, series=RNCP, Size / Dimension="0.061\" L x 0.031\" W (1.55mm x 0.80mm)", Supplier 1=DigiKey
R12 R13: library part CRCW060310K0JNEAC, "RES 10K OHM 5% 1/10W 0603", Device Package="0603 (1608 Metric)", manufacturer="Vishay Dale", Operating Temperature="-55°C ~ 155°C", Power (Watts)="0.1W, 1/10W", Resistance="10 kOhms", Supplier Device Package=0603, Supplier Part Number 1=541-3957-1-ND, Temperature Coefficient=±200ppm/°C, Tolerance=±5%, componentlink1description=Datasheet, componentlink1url=http://www.vishay.com/docs/28773/crcwce3.pdf, componentlink2description="DigiKey Link", componentlink2url=https://www.digikey.com/en/products/detail/vishay-dale/CRCW060310K0JNEAC/7928379, Composition="Thick Film", Height - Seated (Max)="0.022\" (0.55mm)", lastupdated="2/9/2024 8:42:33 PM", Lifecycle Status=Active, Minimum Order=1, Number of Terminations=2, Package / Case="0603 (1608 Metric)", packaging=CutTape, Part Number=CRCW060310K0JNEAC, Part Status=Active, partid=21155, price=0.01, series=CRCW-C, Supplier 1=DigiKey
R14 R15: library part RK73B1JTTDD512J, "RESISTOR", Device Package="0603 (1608 Metric)", manufacturer="KOA Speer Electronics, Inc.", Operating Temperature="-55°C ~ 155°C", Power (Watts)="0.1W, 1/10W", Ratings=AEC-Q200, Resistance="5.1 kOhms", Supplier Device Package=0603, Supplier Part Number 1=2019-RK73B1JTTDD512JCT-ND, Temperature Coefficient=±200ppm/°C, Tolerance=±5%, componentlink1description=Datasheet, componentlink1url=https://www.koaspeer.com/pdfs/RK73B.pdf, componentlink2description="DigiKey Link", componentlink2url=https://www.digikey.com/en/products/detail/koa-speer-electronics-inc/RK73B1JTTDD512J/21680160, Composition="Thick Film", Features="Automotive AEC-Q200", Height - Seated (Max)="0.022\" (0.55mm)", lastupdated="7/25/2024 9:42:51 AM", Lifecycle Status=Active, Minimum Order=1, Number of Terminations=2, Package / Case="0603 (1608 Metric)", packaging=CutTape, Part Number=RK73B1JTTDD512J, partid=89828, price=0.01, series=RK73B, Size / Dimension="0.063\" L x 0.031\" W (1.60mm x 0.80mm)", Supplier 1=DigiKey
R20: library part CRCW060327K0JNEAC, "RES 27K OHM 5% 1/10W 0603", Device Package="0603 (1608 Metric)", manufacturer="Vishay Dale", Operating Temperature="-55°C ~ 155°C", Power (Watts)="0.1W, 1/10W", Supplier Device Package=0603, Supplier Part Number 1=541-CRCW060327K0JNEACCT-ND, Temperature Coefficient=±200ppm/°C, Tolerance=±5%, componentlink1description=Datasheet, componentlink1url=https://www.vishay.com/docs/28773/crcwce3.pdf, componentlink2description="DigiKey Link", componentlink2url=https://www.digikey.com/en/products/detail/vishay-dale/CRCW060327K0JNEAC/7925460, Composition="Thick Film", Height - Seated (Max)="0.022\" (0.55mm)", lastupdated="2/9/2024 8:41:17 PM", Lifecycle Status=Active, Minimum Order=1, Number of Terminations=2, Package / Case="0603 (1608 Metric)", packaging=CutTape, Part Number=CRCW060327K0JNEAC, Part Status=Active, partid=65823, price=0.01, Resistance="27 kOhms", series=CRCW-C, Size / Dimension="0.063\" L x 0.031\" W (1.60mm x 0.80mm)", Supplier 1=DigiKey
S1: "Switch", Manufacturer_Name="XKB Connectivity", Datasheet Link=https://www.helloxkb.com/public/images/pdf/SS-12D10XXX.pdf, Height=10.6mm, Manufacturer_Part_Number=SS-12D10G4
SB1: library part CMP-00030-00002-3, "3-way solder bridge mainly for power rail selection"
SW1: library part CMP-011-00016-1, "TH Right angle SPDT 3A Slide switch"
SW2: library part CMP-011-00015-1, "Switch Tactile N.O. SPST Projected Plunger PC Pins 0.05A 24VDC 1000000Cycle 0.98N Thru-Hole Bag", Current Rating=50mA, Max Operating Temperature=70°C, Min Operating Temperature=-25°C, Max Current Rating=50mA, Mounting Technology="DIP, Through Hole", Pins=4, Throw Configuration=SPST
U1: "Power Supply", Manufacturer_Name=onsemi, Mouser Part Number=863-NCP114ASN330T1G, Arrow Part Number=NCP114ASN330T1G, Arrow Price/Stock=https://www.arrow.com/en/products/ncp114asn330t1g/on-semiconductor?utm_currency=USD&region=europe, Datasheet Link=https://www.onsemi.com/pub/Collateral/NCP114-D.PDF, Height=1.1mm, Manufacturer_Part_Number=NCP114ASN330T1G, Mouser Price/Stock=https://www.mouser.co.uk/ProductDetail/onsemi/NCP114ASN330T1G?qs=OycAS1CGnljPBnaqdh%252BGIA%3D%3D
U2: library part CMP-020-00023-1, "RISC Microcontroller, 32-Bit, FLASH, STM32 CPU, 72MHz, CMOS, PQFP48", Case/Package=LFQFP, Clock Frequency=16MHz, Max Operating Temperature=105°C, Max Supply Voltage=3.6V, Min Operating Temperature=-40°C, Min Supply Voltage=2V, Nominal Supply Voltage=3.3V, Interface=I2C,SPI,USB,CAN,USART, Pins=48, RoHS Compliant=Yes
U3: library part CMP-019-00062-1, "Switching Voltage Regulators 3.7-A boost converter with 0.5-V ultra-low input vo", Max Operating Temperature=125°C, Max Supply Voltage=5.5V, Min Operating Temperature=-40°C, Min Supply Voltage=500mV, Nominal Supply Current=900nA, Output Current=3.7A, Pins=6
U4: library part CMP-015-000000-1, "Walkie talkie module with RDA1846S chip", Package=None, Check_prices=https://www.snapeda.com/parts/SA818S/G-nicerf/view-part/?ref=eda, Component Type=Standard, Design Item ID=SA818S, MF=G-nicerf, MP=SA818S, Pin Count=18, SnapEDA_Link=https://www.snapeda.com/parts/SA818S/G-nicerf/view-part/?ref=snap, Source=SA818S.SchLib
U5: library part CMP-00027-00002-1, "25-mW, stereo, analog input headphone amplifier with programmable gain 14-TSSOP -40 to 85", Case/Package=TSSOP, Max Operating Temperature=150°C, Min Operating Temperature=-40°C, Pins=14
U6 U7: library part CMP-007-00035-2, "Intelligent Control LED Integrated Light Source, 3.5 to 5.3 V, -25 to 80 degC, 4-Pin SMD, RoHS, Bulk", manufacturer="Adafruit Industries", Package Description="4-Pin Surface Mount Device, Body 5 x 5 mm, Pitch 3.3 mm", Case/Package=WS2812B, Datasheet URL=https://cdn-shop.adafruit.com/datasheets/WS2812B.pdf, Datasheet Version=May-13, Manufacturer URL=https://www.adafruit.com/, Mounting Technology=SM, Package Reference=WS2812B, RoHS Compliant=False
VR1: "Variable Resistor", Manufacturer_Name="ALPS Electric", Datasheet Link=https://cdn-reichelt.de/documents/datenblatt/203313RK09K1130A0H.pdf, Height=25.5mm, Manufacturer_Part_Number=RK09K113-LIN10K
Y1: library part CMP-003-00030-8, "8 MHz crystal, CL: 10pF, +/-10ppm"

## Via types
v1: diameter 0.5, hole 0.3, Top Copper to Bottom Copper, tented both sides, 725 vias